# Altium PCB PCB_Tx.PcbDoc
Units mil, origin at the board's own origin, x right, y up, seen from the top; angles counter-clockwise.
Board outline 3010.03 x 2980.03 mil, 2 copper layers (Top Layer, Bottom Layer); 46 components, 39 nets, 191 pads, 38 vias.
Unrouted connection lines stored in the file: 3.
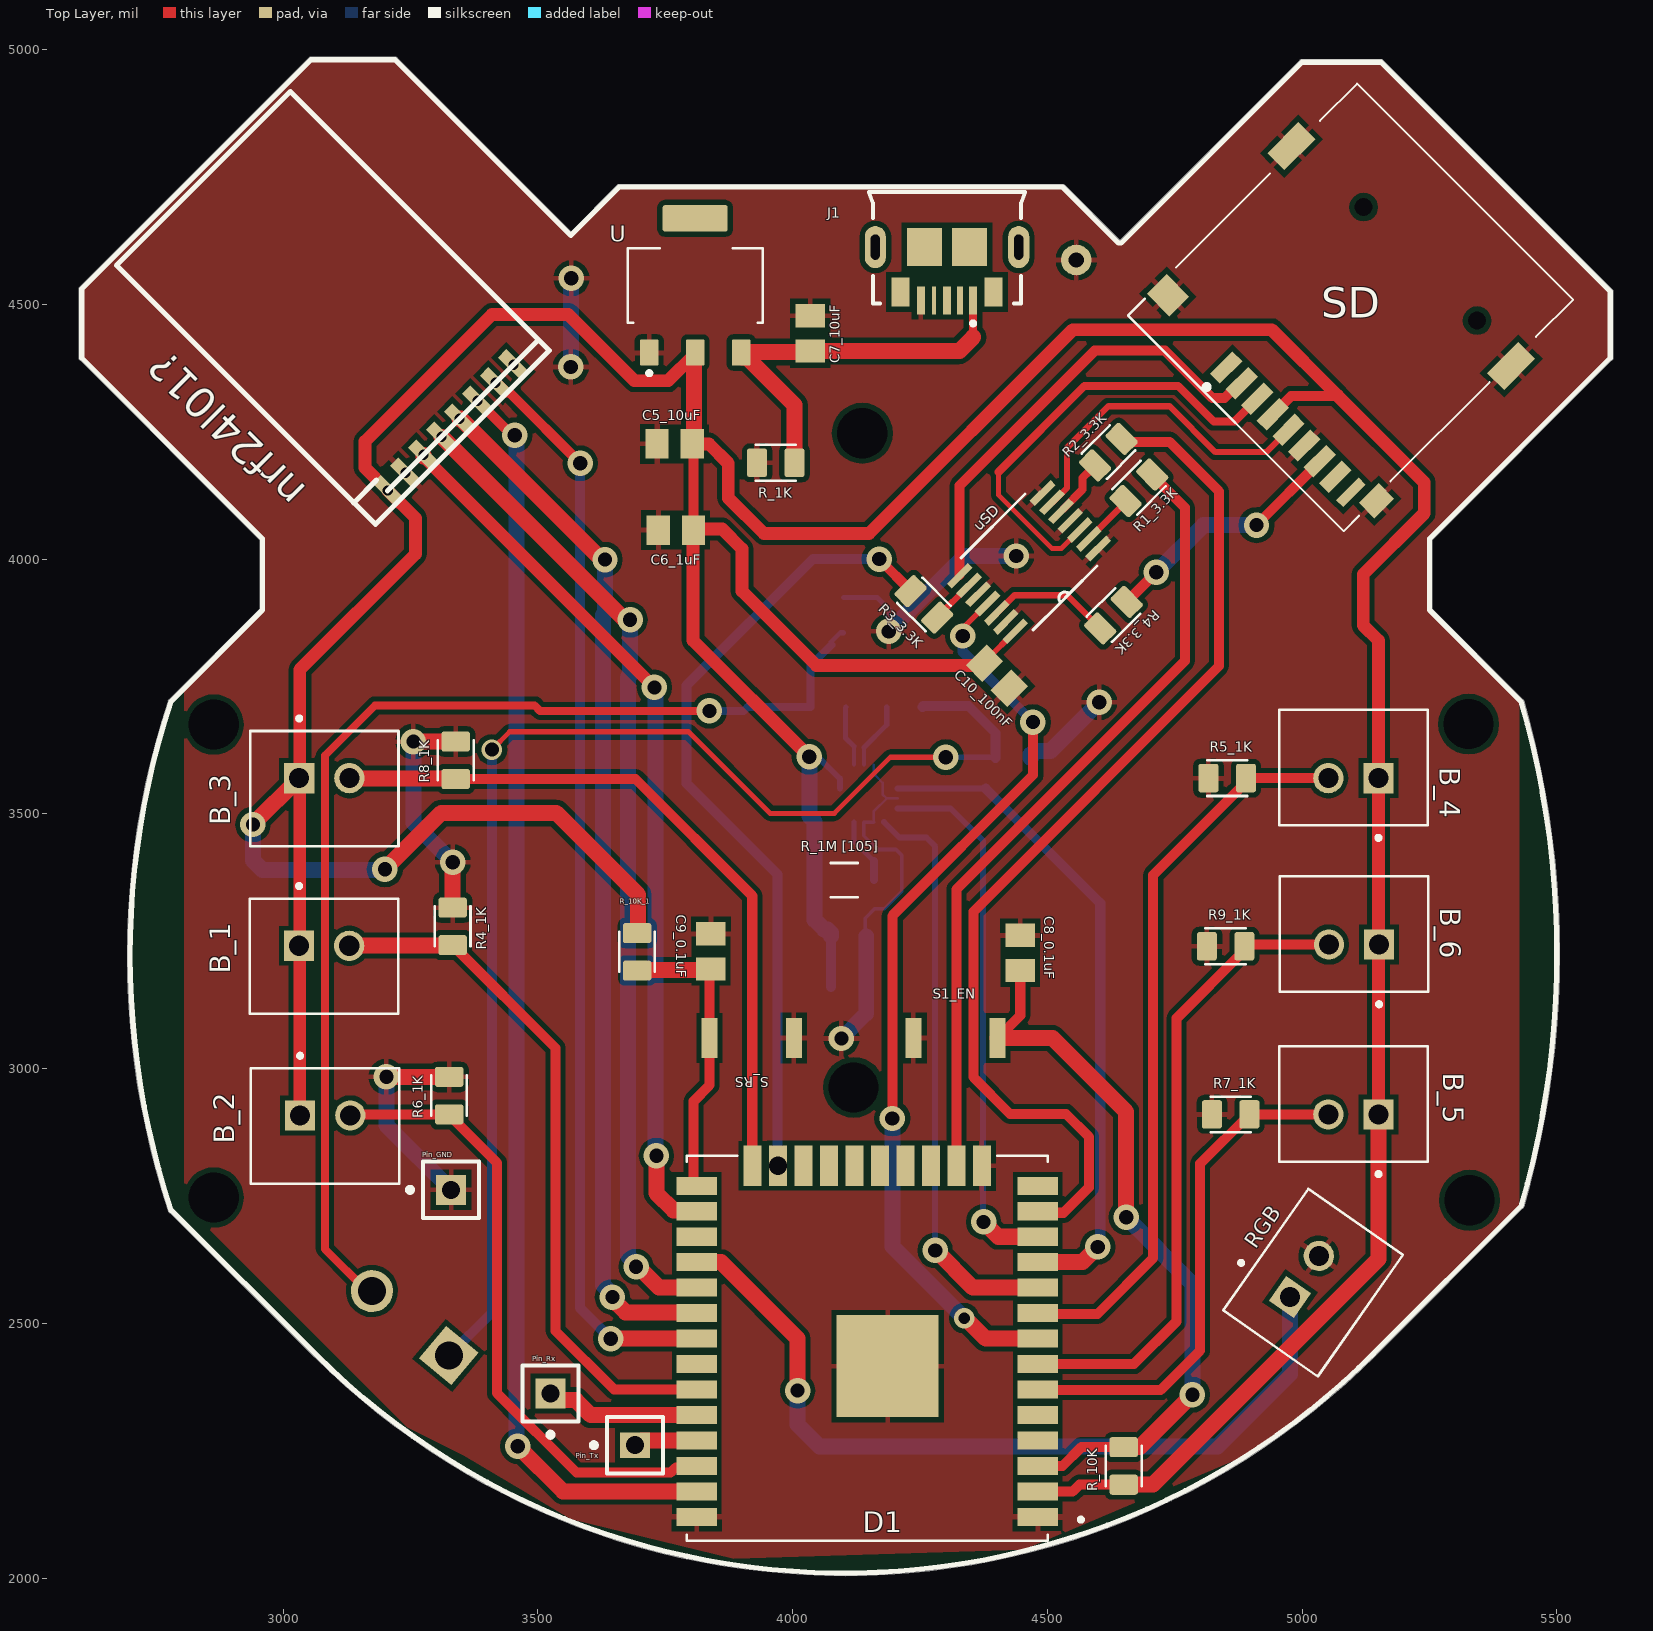
[diagram p0: Top Layer view]
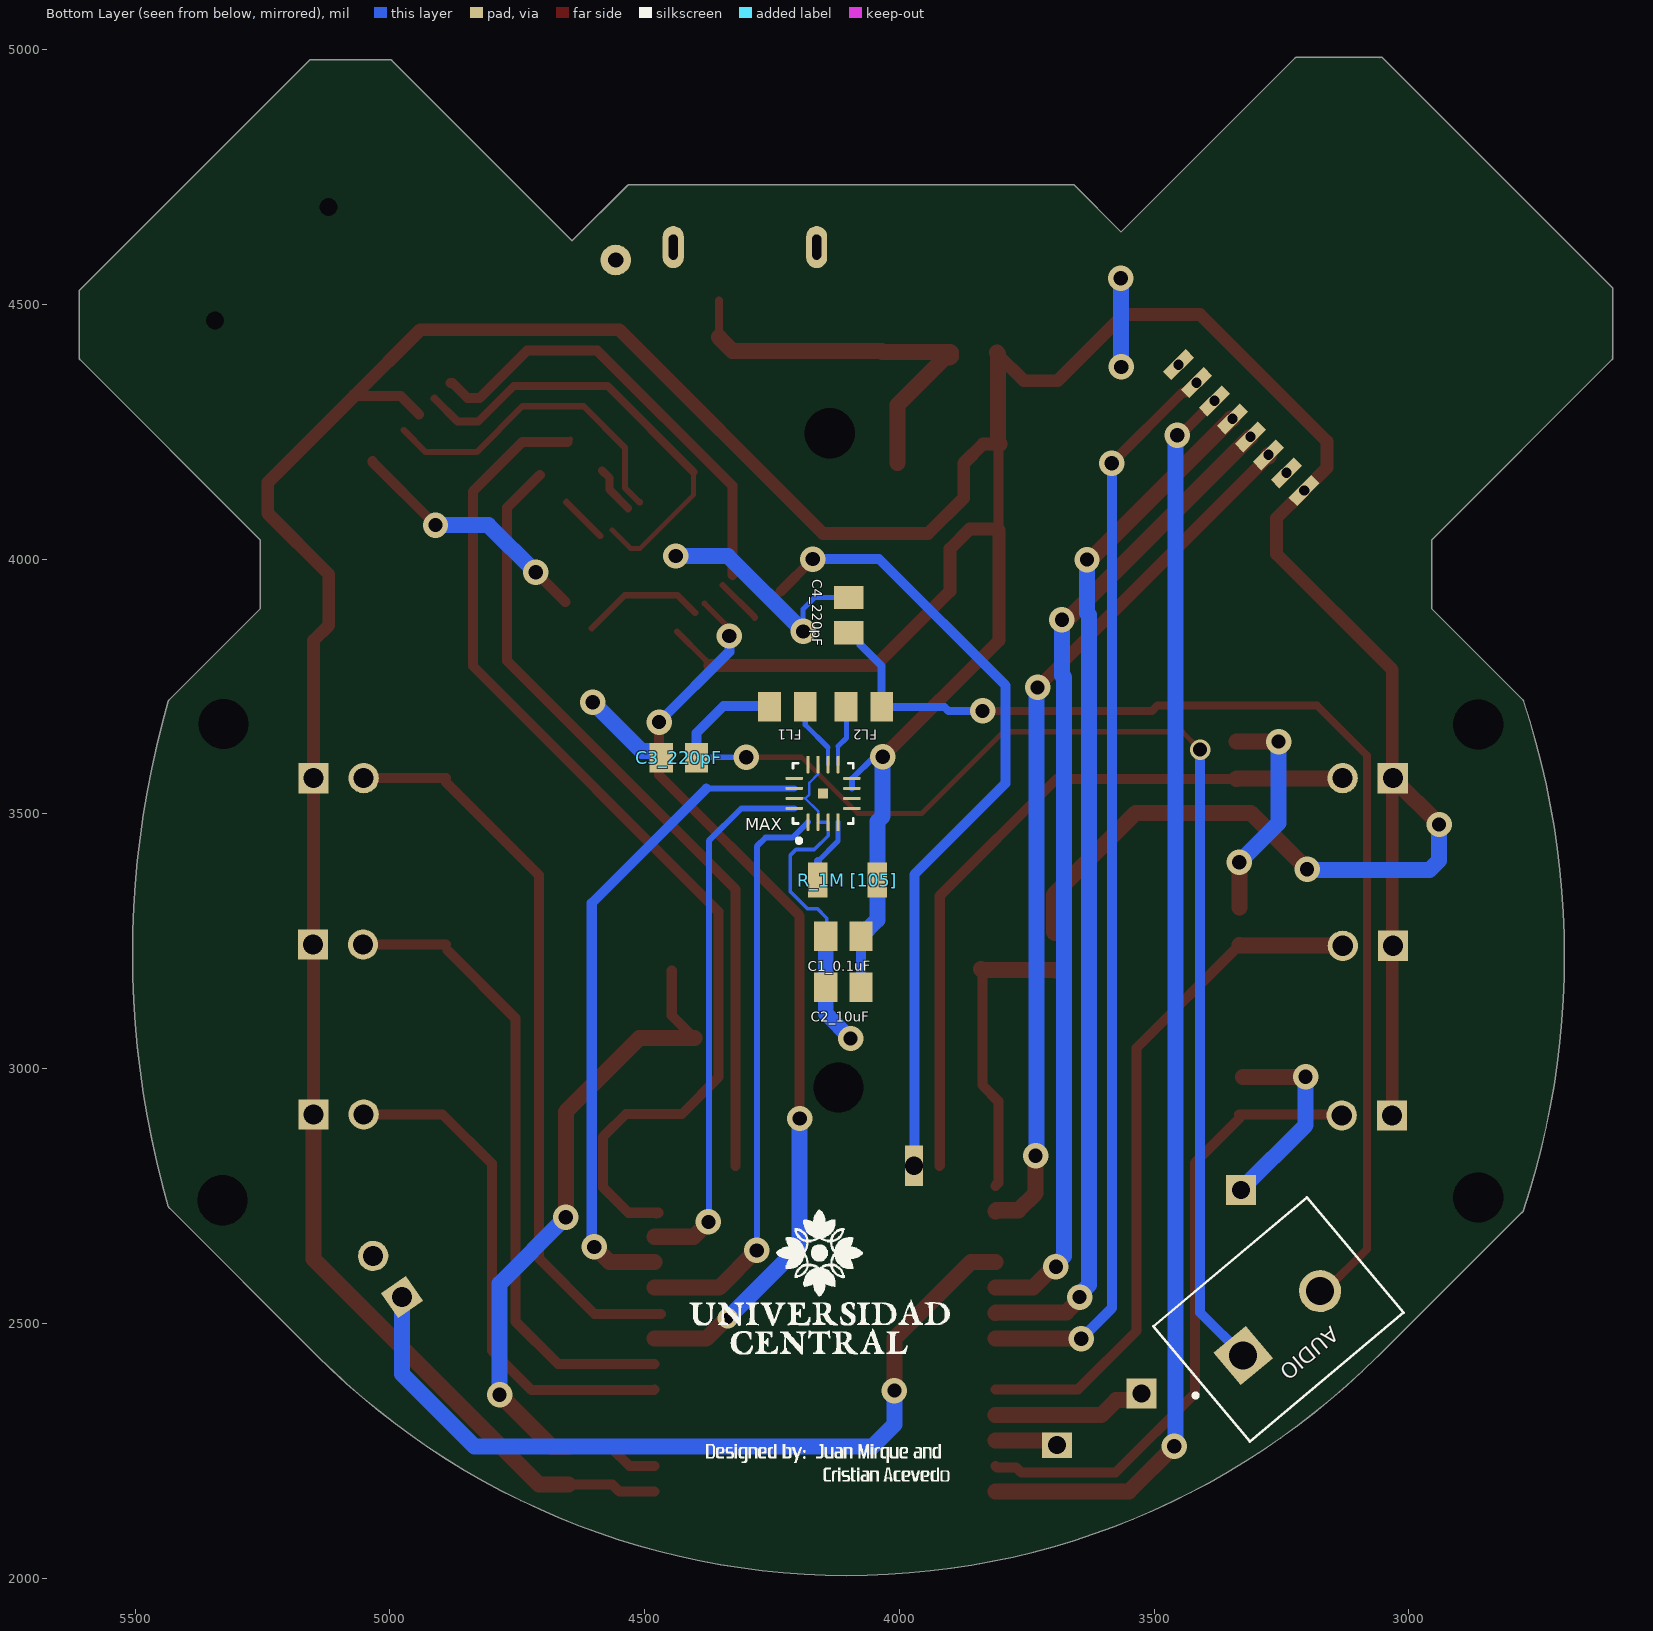
[diagram p1: Bottom Layer view, seen from below]

## Layer stack, top to bottom
Top Solder: solder mask 0.4, Solder Resist, Dk 3.5
Top Layer: signal copper 1.4
Dielectric 1: dielectric 12.6, FR-4, Dk 4.8
Bottom Layer: signal copper 1.4
Bottom Solder: solder mask 0.4, Solder Resist, Dk 3.5

## Board outline
2775.72,2720.29 cw(c4292.07,3221.67) 2775.24,3721.57 cw(c2780,3720) 2776.47,3723.56 2776.45,3723.55 2954.99,3902.08 2954.99,4037.92 2601.45,4391.45 cw(c2605,4395) 2600.65,4397.5 cw(c2605,4400) 2599.99,4400 2599.99,4530 cw(c2605,4530) 2601.47,4533.56 2601.45,4533.55 3051.44,4983.53 cw(c3054.99,4979.99) 3057.48,4984.34 cw(c3060,4980) 3060,4985.02 3220,4985.02 cw(c3220,4980) 3223.56,4983.53 3223.55,4983.55 3565,4642.09 3656.45,4733.55 3656.44,4733.53 cw(c3660,4730) 3660,4735.02 4530,4735.02 cw(c4530,4730) 4533.56,4733.53 4533.55,4733.55 4642.5,4624.59 4996.45,4978.55 4996.44,4978.53 cw(c5000,4975) 5000,4980.02 5155,4980.02 cw(c5155,4975) 5158.56,4978.53 5158.55,4978.55 5608.55,4528.55 5608.53,4528.56 cw(c5605,4525) 5610.02,4525 5610.02,4395 cw(c5605,4395) 5608.53,4391.44 5608.55,4391.45 5255.02,4037.92 5255.02,3902.08 5433.55,3723.54 5433.54,3723.56 cw(c5430.01,3719.99) 5434.82,3721.38 cw(c3714.85,3224.99) 5505.02,3224.99 cw(c3714.85,3224.99) 5434.82,2728.6 cw(c5430.01,2729.99) 5431.9,2725.35 5145.01,2438.46 5145.01,2438.47 ccw(c5141.46,2442) 5145.02,2438.47 5145.01,2438.47 cw(c4101.58,3477.54) 3062.51,2434.11 cw(c3066.05,2437.67) 3062.5,2434.12 2779,2717.08 cw(c2780.48,2721.87)

## Design rules (kind name [scope] priority, off if disabled: settings)
Clearance [All] p1: gap=10 ignorepadtopadclearanceinfootprint=FALSE except(0: Arc-Hole Track-Hole SMDPad-Hole THPad-Hole Via-Hole Fill-Hole Poly-Hole Region-Hole Text-Hole)
PolygonConnect [All] p1: connectstyle=Relief reliefconductorwidth=10 reliefentries=4 polygonreliefangle="90 Angle" airgapwidth=10
RoutingVias [All] p1: holewidth=28 width=50 viastyle="Through Hole" minholewidth=28 minwidth=50 maxholewidth=28 maxwidth=50
SolderMaskExpansion [All] p1: expansion=4 istentingtop=FALSE
Width [All] p1: maxlimit=31.5 minlimit=5 preferedwidth=31.5
30 further rules are at their usual default settings.

## Components (designator, comment, footprint, x,y, rotation, side; value= is the part's Value field where it differs from the comment)
AUDIO "KF301-2P" HANDSON_KF301-2P 3250,2500 r140 bottom
B_1 "" JST_B2B-XH-A(LF)(SN) 3080.79,3220.33 r180 top
B_2 "" JST_B2B-XH-A(LF)(SN) 3082.79,2887.33 r180 top
B_3 "" JST_B2B-XH-A(LF)(SN) 3081,3549.33 r180 top
B_4 "" JST_B2B-XH-A(LF)(SN) 5100.79,3590.67 r0 top
B_5 "" JST_B2B-XH-A(LF)(SN) 5100.79,2930.67 r0 top
B_6 "" JST_B2B-XH-A(LF)(SN) 5102,3264 r0 top
C1_0.1uF "0805" CAPC2012X94N 4110,3260 r0 bottom
C2_10uF "0805" CAPC2012X94N 4110,3160 r0 bottom
C3_220pF "0805" CAPC2012X94N 4433,3610 r0 bottom
C4_220pF "0805" CAPC2012X94N 4100,3890 r90 bottom
C5_10uF "0805" CAPC2012X94N 3768.65,4226 r0 top
C6_1uF "0805" CAPC2012X94N 3771,4057 r0 top
C7_10uF "0805" CAPC2012X94N 4035,4443 r270 top
C8_0.1uF "0805" CAPC2012X94N 4447,3227 r270 top
C9_0.1uF "0805" CAPC2012X94N 3840,3230 r270 top
C10_100nF "0805" CAPC2012X94N 4401,3771 r135 top
D1 "ESP32_MODULE_2" XCVR_ESP32-WROOM-32U 4146.62,2451 r180 top
FL1 "Ferrite Beads" BEADC2012X105N 4220,3710 r0 bottom
FL2 "Ferrite Beads" BEADC2012X105N 4070,3710 r180 bottom
J1 "USB3075-30-A" GCT_USB3075-30-A 4354.43,4507.87 r180 top
MAX "MAX98357AETE+" QFN50P300X300X80-17N 4150,3540 r90 bottom
nrf24l01? "SMD" NRF24L01 3226.15,4112.72 r135 top
Pin_GND "Socket" PIN1#1 3330,2762 r90 top
Pin_Rx "Socket" PIN1#1 3525,2362 r180 top
Pin_Tx "Socket" PIN1#2 3690.74,2260.74 r90 top
R1_3.3K "0805" RESC2012X65N 4680,4140 r45 top
R2_3.3K "0805" RESC2012X65N 4620,4210 r45 top
R3_3.3K "0805" RESC2012X65N 4258,3911 r135 top
R4_1K "0805" RESC2012X65N 3333,3279 r90 top
R4_3.3K "0805" RESC2012X65N 4630,3890 r45 top
R5_1K "0805" RESC2012X65N 4853.19,3570 r0 top
R6_1K "0805" RESC2012X65N 3326,2947 r90 top
R7_1K "0805" RESC2012X65N 4860,2910 r0 top
R8_1K "0805" RESC2012X65N 3339,3605 r90 top
R9_1K "0805" RESC2012X65N 4850,3240 r0 top
R_1K "0805" RESC2012X65N 3967.19,4189 r0 top
"R_1M [105]" "RC1206" RESC3116X65N 4101.73,3370 r180 top
R_10K "0805" RESC2012X65N 4650,2220 r90 top
R_10K_1 "0805" RESC2012X65N 3695,3229 r270 top
RGB "" JST_B2B-XH-A(LF)(SN) 5021.7,2580 r235 top
S1_EN "SW-PB" SKRK 4320,3060 r180 top
S_RS "SW-PB" SKRK 3920,3060 r0 top
SD "Micro SD Card Holder" "Micro SD Card Holder" 5122.7,4498.23 r135 top
U "AMS1117-3.3" SOT229P700X180-4N 3809,4537 r0 top
uSD "74LVC125APW,118" SOP65P640X110-14N 4464,3994 r225 top

## Footprints (in the part's own frame and the unit in brackets; to place one, negate y for a bottom-side part, rotate by r counter-clockwise, add the part's x,y. Pads: shape width x height; smd on the part's side, far side on the other; paste and mask are expansions set on the pad)
BEADC2012X105N [mm]
  rect 1.14x1.47 smd: 1(-0.89,0) 2(0.89,0)
CAPC2012X94N [mm]
  rect 1.16x1.47 smd: 1(-0.88,0) 2(0.88,0)
GCT_USB3075-30-A [mm]
  rect 0.4x1.4 smd: 1(0,0) 3(1.3,0) 5(2.6,0)
  rect 0.3x1.4 smd: 2(0.65,0)
  rect 0.2x1.4 smd: 4(1.95,0)
  rect 0.9x1.45 smd: S1(-1.02,-0.42) S2(3.62,-0.42)
  rect 1.75x1.9 smd: S3(0.175,-2.65) S4(2.425,-2.65)
  oval 1.05x2.1 hole 0.45 slot 1.25 at 90 deg: S5(-2.275,-2.65) S6(4.875,-2.65)
  silkscreen extent -2.6,-5.4 5.2,1.25, body extent -2.63,-5.31 5.17,0.24, height 2.7
HANDSON_KF301-2P [mm]
  rect 2.1x2.1 hole 1.4: 1(-2.5,0)
  round 2.1 hole 1.4: 2(2.5,0)
  silkscreen extent -5.7,-3.5 5,4
JST_B2B-XH-A(LF)(SN) [mm]
  rect 1.508x1.508 hole 1: 1(1.25,-0.525)
  round 1.508 hole 1: 2(-1.25,-0.525)
  silkscreen extent -3.7,-3.6 3.7,2.87, body extent -3.7,-2.96 3.7,2.79, height 7
"Micro SD Card Holder" [mm]
  rect 0.7x1.6 smd paste+0 mask+0: 1(2.684,7.075) 2(1.584,7.075) 3(0.484,7.075) 4(-0.616,7.075) 5(-1.716,7.075) 6(-2.816,7.075) 7(-3.916,7.075) 8(-5.016,7.075)
  rect 1.1x1.4 smd paste+0 mask+0: 10(-7.316,6.475)
  rect 1.6x1.4 smd paste+0 mask+0: 11(7.284,6.575)
  rect 1.2x2.2 smd paste+0 mask+0: 12(-7.316,-3.025) 13(8.184,-3.025)
  rect 0.5x1.6 smd paste+0 mask+0: Cd(-6.116,7.075)
  round 0 hole 0.9 unplated paste-1000 mask+0: ""(-4.516,-3.425) ""(3.484,-3.425)
  silkscreen extent -7.22,-7.55 8.08,8.7, body extent -7.57,-7.42 8.43,7.83, height 1.85
NRF24L01 [mil] "smd"
  rect 62.99x23.62 hole 20: 1(30,-1) 2(30,-49.99) 3(30,-100) 4(30,-150) 5(30,-200) 6(30,-250) 7(30,-300) 8(30,-350)
  silkscreen extent 0,-420 719,63, body extent -3,-412 706,60, height 32
PIN1#1 [mm] "Connector; Plug"
  rect 1.5x1.5 hole 0.9: 1(0,0)
  silkscreen extent -1.4,-1.4 1.4,2.17
PIN1#2 [mm] "Connector; Plug"
  rect 1.25x1.5 hole 0.9: 1(0,0)
  silkscreen extent -1.4,-1.4 1.4,2.17
QFN50P300X300X80-17N [mm]
  rrect50% 0.86x0.15 smd: 1(-1.435,0.75) 2(-1.435,0.25) 3(-1.435,-0.25) 9(1.435,-0.75) 10(1.435,-0.25) 11(1.435,0.25) 12(1.435,0.75)
  rect 0.86x0.15 smd: 4(-1.435,-0.75)
  rrect50% 0.15x0.86 smd: 5(-0.75,-1.435) 6(-0.25,-1.435) 7(0.25,-1.435) 8(0.75,-1.435) 13(0.75,1.435) 14(0.25,1.435) 15(-0.25,1.435) 16(-0.75,1.435)
  rect 0.508x0.508 smd paste-2: 17(0,0)
  silkscreen extent -2.46,-1.5 1.5,1.5, body extent -1.5,-1.5 1.5,1.5, height 0.75
RESC2012X65N [mm]
  rrect25% 1x1.42 smd: 1(-0.935,0) 2(0.935,0)
  silkscreen extent -1,-0.89 1,0.89
RESC3116X65N [mm]
  rect 0.97x1.73 smd far side: 1(-1.48,0) 2(1.48,0)
  silkscreen extent -0.67,-0.85 0.67,0.85
SKRK [mm]
  rect 0.8x2 smd: 1(-2.1,0) 2(2.1,0)
SOP65P640X110-14N [mil]
  rect 58x14 smd: 1(-115,77) 2(-115,51) 3(-115,26) 4(-115,0) 5(-115,-26) 6(-115,-51) 7(-115,-77) 8(115,-77) 9(115,-51) 10(115,-26) 11(115,0) 12(115,26) 13(115,51) 14(115,77)
  silkscreen extent -89,-100 89,100, body extent -131,-98 121,98, height 43
SOT229P700X180-4N [mm]
  rrect15% 0.93x1.31 smd: 1(-2.29,-3.345) 2(0,-3.345) 3(2.29,-3.345)
  rrect15% 3.24x1.31 smd: 4(0,3.345)
  silkscreen extent -3.36,-4.47 3.36,1.86, body extent -3.35,-3.52 3.35,3.78, height 1.91
XCVR_ESP32-WROOM-32U [mm]
  rect 2x0.9 smd: 1(-8.5,8.41) 2(-8.5,7.14) 3(-8.5,5.87) 4(-8.5,4.6) 5(-8.5,3.33) 6(-8.5,2.06) 7(-8.5,0.79) 8(-8.5,-0.48) 9(-8.5,-1.75) 10(-8.5,-3.02) 11(-8.5,-4.29) 12(-8.5,-5.56) 13(-8.5,-6.83) 14(-8.5,-8.1) 25(8.5,-8.1) 26(8.5,-6.83) 27(8.5,-5.56) 28(8.5,-4.29) 29(8.5,-3.02) 30(8.5,-1.75) 31(8.5,-0.48) 32(8.5,0.79) 33(8.5,2.06) 34(8.5,3.33) 35(8.5,4.6) 36(8.5,5.87) 37(8.5,7.14) 38(8.5,8.41)
  rect 0.9x2 smd: 15(-5.715,-9.1) 16(-4.445,-9.1) 17(-3.175,-9.1) 18(-1.905,-9.1) 19(-0.635,-9.1) 20(0.635,-9.1) 21(1.905,-9.1) 22(3.175,-9.1) 24(5.715,-9.1)
  rect 0.9x2 hole 0.9: 23(4.445,-9.1)
  rect 5.08x5.08 smd: 39(-1.016,0.889)
  silkscreen extent -10.75,-9.6 9,9.6, body extent -9.04,-9.65 9.04,9.59, height 3.4

## Part data
AUDIO: "2 Pin Terminal Block 5mm Pitch", Package=Package, Availability=Unavailable, MF="Handson Technology", MP=KF301-2P, Price=None, SnapEDA_Link=https://www.snapeda.com/parts/KF301-2P/Handson%20Technology/view-part/4276957/?ref=snap
B_1 B_2 B_3 B_4 B_5 B_6 RGB: library part B2B-XH-A(LF)(SN), "Connector Header Through Hole 2 position 0.098 (2.50mm)", Package=None, Availability="In Stock", Check_prices=https://www.snapeda.com/parts/B2B-XH-A(LF)(SN)/JST%20Sales%20America%20Inc./view-part/492310/?ref=eda, MF="JST Sales", MP=B2B-XH-A(LF)(SN), Price=None, Purchase-URL=https://pricing.snapeda.com/search/part/B2B-XH-A(LF)(SN)/?ref=eda, SnapEDA_Link=https://www.snapeda.com/parts/B2B-XH-A(LF)(SN)/JST%20Sales%20America%20Inc./view-part/492310/?ref=snap
C1_0.1uF C2_10uF C3_220pF C4_220pF C5_10uF C6_1uF C7_10uF C8_0.1uF C9_0.1uF C10_100nF: library part 0805YC103J4T2A, "10000pF Â±5% 16V Ceramic Capacitor X7R 0805 _2012 Metric_", Package="2012 AVX", Availability=Unavailable, MF=AVX, MP=0805YC103J4T2A, Price=None, SnapEDA_Link=https://www.snapeda.com/parts/0805YC103J4T2A/AVX/view-part/606803/?ref=snap
FL1 FL2: library part BLM21PG221BH1D, Package=None, Availability=Unavailable, MP=BLM21PG221BH1D, Price=None
J1: "USB - micro B USB 2.0 Receptacle Connector 5 Position Surface Mount, Right Angle; Through Hole", Package=None, Digi-Key_Part_Number=2073-USB3075-30-ACT-ND, Digi-Key_Purchase_URL=https://www.digikey.com/product-detail/en/gct/USB3075-30-A/2073-USB3075-30-ACT-ND/9859705?utm_source=snapeda&utm_medium=aggregator&utm_campaign=symbol, MF="Global Connector Technology", MP=USB3075-30-A, SnapEDA_Link=https://www.snapeda.com/parts/USB3075-30-A/Global%20Connector%20Technology/view-part/229370/?ref=snap
MAX: "Amplifier IC 1-Channel _Mono_ Class D 16-TQFN _3x3_", Package="TQFN-16 Maxim", Availability=Unavailable, MF="Maxim Integrated", MP=MAX98357AETE+, Price=None, SnapEDA_Link=https://www.snapeda.com/parts/MAX98357AETE%2B/Maxim%20Integrated/view-part/229145/?ref=snap
nrf24l01?: library part nrf24l01_smd
R1_3.3K R2_3.3K R3_3.3K R4_1K R4_3.3K R5_1K R6_1K R7_1K R8_1K R9_1K R_1K R_10K R_10K_1: library part 2-2176053-0, "RES 0.33 OHM 1% 1/4W 0805", Power_Rating=".25 W", Resistance=.33, Tolerance=1%, Availability=Unavailable, EU_RoHS_Compliance="Compliant with Exemptions", MF="TE Connectivity", MP=2-2176053-0, Package=0805, Price=None, SnapEDA_Link=https://www.snapeda.com/parts/2-2176053-0/TE%20Connectivity/view-part/2214508/?ref=snap
"R_1M [105]": library part RC1206JR-0713RL, "13 Ohms Â±5% 0.25W, 1/4W Chip Resistor 1206 _3216 Metric_ Moisture Resistant Thick Film", Package="3116 Yageo", Availability=Unavailable, MF=Yageo, MP=RC1206JR-0713RL, Price=None, SnapEDA_Link=https://www.snapeda.com/parts/RC1206JR-0713RL/Yageo/view-part/105893/?ref=snap
S1_EN S_RS: "Switch", LatestRevisionDate=17-Jul-2002, LatestRevisionNote="Re-released for DXP Platform.", PackageDescription="Switch; 2 Leads", PackageReference=SPST-2, Published=24-Mar-1999, Publisher="Altium Limited"
U: "Sot223/Pkg 1-Amp 3.3-Volt Low Drop Out Voltage Regulatator", Package=None, Availability=Unavailable, MF="Advanced Monolithic Systems", MP=AMS1117-3.3, Price=None, SnapEDA_Link=https://www.snapeda.com/parts/AMS1117-3.3/Advanced%20Monolithic%20Systems/view-part/53450/?ref=snap
uSD: "IC BUF NON-INVERT 3.6V 14TSSOP", Package=None, Availability=Good, Check_prices=https://www.snapeda.com/parts/74LVC125APW,118/Nexperia/view-part/5160321/?ref=eda, MF="Nexperia USA Inc.", MP=74LVC125APW,118, Price=None, Purchase-URL=https://pricing.snapeda.com/search/part/74LVC125APW,118/?ref=eda, SnapEDA_Link=https://www.snapeda.com/parts/74LVC125APW,118/Nexperia/view-part/5160321/?ref=snap
Pin_GND Pin_Rx Pin_Tx: LatestRevisionDate=17-Jul-2002, LatestRevisionNote="Re-released for DXP Platform.", Publisher="Altium Limited"

## Free pads (board coordinates)
  round 0 hole 98.42 unplated paste-39370.1 mask+0: 13(2864,2746.91) 13(2864,3675) 13(4120,2963) 13(4137,4247) 13(5327,3676) 13(5329,2741) 13(5329,2742)
  round 60 hole 30: 16(4557,4587)

## Via types
v1: diameter 50, hole 28, Top Layer to Bottom Layer, 36 vias
v2: diameter 40, hole 28, Top Layer to Bottom Layer, 1 vias
v3: diameter 40, hole 22, Top Layer to Bottom Layer, 1 vias

## Nets (pads, with @x,y where several pads share a name; then routed paths per layer and width w, separated by ;. In a path a pad name is that pad's centre, name@x,y a point inside that pad or via, vN(x,y) a via of type N, cw(c..) or ccw(c..) an arc to the next point about the centre after c; other vN are vias at no path point)
3v3: "R_1M [105].2" B_1.1 B_2.1 B_3.1 B_4.1 B_5.1 B_6.1 C1_0.1uF.1 C2_10uF.1 C5_10uF.2 C6_1uF.2 C10_100nF.2 D1.2 MAX.7 MAX.8 nrf24l01?.1 R_10K.1 R_10K_1.1 SD.4 U.2 uSD.14 | length 10134.4
  Top Layer w10: C6_1uF.2 C6_1uF.2@3807.65,4059 ; C10_100nF.2@4372.19,3791.18 C10_100nF.2 ; 5069.45,4321.26 5069.45,4320 5070.08,4320
  Top Layer w11.81: C10_100nF.2@4380.69,3801.79 uSD.14
  Top Layer w19.68: 3180,4160.28 nrf24l01?.1 ; C5_10uF.2 3805.65,4226 C6_1uF.2 ; D1.2 4549.9,2169.9 4563.19,2183.19 R_10K.1 ; SD.4 4978.77,4320 5069.45,4320
  Top Layer w25: B_2.1 3033,2908 3033,3783 3260,4010 3260,4080.28 nrf24l01?.1 ; 3180,4160.28 3161,4179.28 3161,4231 3410,4480 3560,4480 3690,4350 3755.69,4350 U.2@3806.44,4400.75 ; C6_1uF.2 3804.65,4057 3804.65,3840.35 v1(4033,3612) ; C5_10uF.2@3805.65,4226 3836,4226 3874,4188 3874,4120 3944,4050 4150,4050 4550,4450 4940.71,4450 5069.45,4321.26 ; C6_1uF.2@3807.65,4059 3862,4059 3901,4020 3901,3937 4046.82,3791.18 C10_100nF.2@4372.19,3791.18 ; 5070.08,4320 5240,4150.08 5240,4090 5120,3970 5120,3870 5150,3840 B_4.1 B_5.1
  Top Layer w31.5: v1(2941,3479) 2941,3479.21 B_3.1 ; v1(3200,3391) 3311,3502 3536,3502 3697,3341 3697,3267.81 R_10K_1.1 ; C5_10uF.2 3806.44,4229.15 3806.44,4400.75 3806.44,4402.75 U.2 ; R_10K.1 4707.19,2183.19 5150,2626 B_5.1
  Bottom Layer w11.81: v1(4033,3612) 4049.85,3612 4092.32,3569.53 MAX.8 MAX.7
  Bottom Layer w19.68: C2_10uF.1 C1_0.1uF.1
  Bottom Layer w31.5: v1(2941,3479) 2941,3408.45 2959.45,3390 3199,3390 v1(3200,3391) ; v1(4033,3612) 4033,3495.21 4043.46,3484.75 4043.46,3370 4043.46,3291.89 4062.17,3273.19 4068.27,3273.19 4075.35,3266.1 C1_0.1uF.1
GND: C1_0.1uF.2 C2_10uF.2 C3_220pF.2 C4_220pF.2 C5_10uF.1 C6_1uF.1 C7_10uF.1 C8_0.1uF.1 C9_0.1uF.1 C10_100nF.1 D1.1 D1.15 D1.38 D1.39 J1.5 MAX.2 MAX.3 MAX.11 MAX.15 nrf24l01?.2 pad.16 Pin_GND.1 R4_1K.2 R5_1K.1 R6_1K.2 R7_1K.1 R8_1K.2 R9_1K.1 R_1K.1 RGB.2 S1_EN.2 S_RS.2 SD.6 SD.10 SD.11 SD.12 SD.13 U.1 uSD.1 uSD.4 uSD.7 uSD.10 uSD.13 | length 2377.7
  Top Layer w31.5: v1(3203,2983.81) R6_1K.2 ; v1(3256,3641.81) R8_1K.2 ; R4_1K.2 v1(3333,3405) ; v1@3563,4368 3563,4375 v1(3565,4377) ; v1@4596.99,3719 v1(4602,3719)
  Bottom Layer w5: MAX.2 4159.84,3505.26 4184.95,3530.37 ; MAX.11 4159.84,3578.16 4177,3561 4177,3538.32 4184.95,3530.37 ; MAX.15 4206.29,3530.37 4184.95,3530.37
  Bottom Layer w7: C1_0.1uF.2 4142.66,3261.98 4142.66,3295.34 4161.33,3314 4181,3314 4214,3347 4214,3419 4203,3430 4167,3430 4140.16,3456.84 MAX.3 MAX.2
  Bottom Layer w10: C4_220pF.2 4166.35,3924.65 4189,3902 v1(4189,3858)
  Bottom Layer w30: v1(4096,3059) 4144.65,3107.65 C2_10uF.2 C1_0.1uF.2
  Bottom Layer w31.5: v1(3203,2983.81) 3203,2889 Pin_GND.1 ; v1(3256,3641.81) 3256,3482 v1(3333,3405) ; v1(3565,4377) 3565.5,4377.5 3565.5,4550.5 v1(3566,4551) ; v1(4189,3858) 4337,4006 v1(4439,4006) ; C3_220pF.2 4467.65,3616.1 4474.73,3623.19 4506.19,3623.19 v1(4602,3719)
NetAUDIO_1: AUDIO.1 C3_220pF.1 FL1.2 | length 2553.8
  Top Layer w10: v2(3410,3626) 3445,3661 3796,3661 3956,3501 4082,3501 4192,3611 v1(4301,3611)
  Bottom Layer w10: v1(4301,3611) 4397.35,3611 C3_220pF.1
  Bottom Layer w19.68: AUDIO.1 3410,2521.34 v2(3410,3626) ; FL1.2 4256.46,3711.42 4345.58,3711.42 4398.35,3658.65 C3_220pF.1
NetAUDIO_2: AUDIO.2 C4_220pF.1 FL2.2 | length 2272.6
  Top Layer w10: AUDIO.2@3164.73,2563.27 AUDIO.2
  Top Layer w15.75: AUDIO.2@3164.73,2563.27 3082,2646 3082,3614 3181,3713 3493.59,3713 3504.59,3702 v1(3837,3702)
  Bottom Layer w10: 4076.06,3831.42 4076.06,3837.52 4093.9,3855.35 C4_220pF.1
  Bottom Layer w15.75: v1(3837,3702) 3904,3702 3912,3710 FL2.2 4034.96,3790.32 4076.06,3831.42
NetB_1_2: B_1.2 D1.33 R4_1K.1 | length 1369
  Top Layer w19.68: R4_1K.1 3535,3040.19 3535,2485 3650.1,2369.9 D1.33
  Top Layer w31.5: B_1.2 3130.59,3241.59 3332.41,3241.59 R4_1K.1
NetB_2_2: B_2.2 D1.36 R6_1K.1 | length 1248.1
  Top Layer w10: R6_1K.1@3333.19,2901.73 R6_1K.1@3333.19,2910
  Top Layer w19.68: B_2.2 3132,2910 3326,2910 R6_1K.1@3333.19,2910 ; R6_1K.1@3333.19,2901.73 3420,2814.92 3420,2362.9 3575.9,2207 3761,2207 3771,2217 3809.07,2217 D1.36
NetB_3_2: B_3.2 D1.24 R8_1K.1 | length 1416.5
  Top Layer w19.68: R8_1K.1 3691.81,3568.19 3921,3339 3921,2809.88 D1.24
  Top Layer w31.5: B_3.2 3131.12,3569.09 3338.09,3569.09 R8_1K.1
NetB_4_2: B_4.2 D1.9 R5_1K.2 | length 1463.8
  Top Layer w10: R5_1K.2@4890,3561.73 R5_1K.2
  Top Layer w19.68: D1.9@4468.52,2518.48 4481.26,2518.48 4598.48,2518.48 4708,2628 4708,3379.73 R5_1K.2@4890,3561.73 ; R5_1K.2 B_4.2
NetB_5_2: B_5.2 D1.6 R7_1K.2 | length 1009.7
  Top Layer w19.68: D1.6 4482.16,2369 4722.67,2369 4800,2446.33 4800,2813.19 R7_1K.2 B_5.2
NetB_6_2: B_6.2 D1.7 R9_1K.2 | length 1265.9
  Top Layer w10: R9_1K.2@4886.81,3231.73 R9_1K.2 R9_1K.2@4890.14,3243.33
  Top Layer w19.68: D1.7 4669.9,2419.9 4754,2504 4754,3098.92 R9_1K.2@4886.81,3231.73 ; R9_1K.2@4890.14,3243.33 B_6.2
NetC7_10uF_2: C7_10uF.2 J1.1 R_1K.2 U.3 | length 805.4
  Top Layer w15.75: 4354.43,4435.43 J1.1
  Top Layer w31.5: R_1K.2 4004,4302.34 3911.07,4395.27 3901.72,4395.27 3899.16,4397.83 U.3 3900.68,4406.83 4033.48,4406.83 C7_10uF.2 4327.35,4408.35 4354.43,4435.43
NetC8_0.1uF_2: C8_0.1uF.2 D1.3 R_10K.2 S1_EN.1 | length 1433.7
  Top Layer w19.68: S1_EN.1 4447,3104.32 C8_0.1uF.2 ; D1.3 4529.9,2219.9 4566.81,2256.81 R_10K.2
  Top Layer w31.5: S1_EN.1 4510,3060 4655,2915 v1(4655,2708) ; R_10K.2 4681.81,2256.81 v1(4785,2360)
  Bottom Layer w31.5: v1(4655,2708) 4785,2578 v1(4785,2360)
NetC9_0.1uF_2: C9_0.1uF.2 D1.25 R_10K_1.2 S_RS.1 | length 585.6
  Top Layer w19.68: D1.25 3806,2775.87 3806,2936 3837.32,2967.32 S_RS.1 C9_0.1uF.2@3837.32,3193.77
  Top Layer w31.5: R_10K_1.2 3696.58,3193.77 3837.32,3193.77 3838.42,3193.77 C9_0.1uF.2
NetD1_8: D1.8 uSD.11 | length 1791.1
  Top Layer w11: v1@4339.43,3869.43 uSD.11
  Top Layer w19.7: v1@4195.83,2902.17 4195.83,3299.83 4472,3576 v1(4472,3680)
  Top Layer w31.5: v1@4195.83,2902.17 v1(4196,2902) ; v3(4337,2510) 4339.3,2510 4379.4,2469.9 D1.8
  Bottom Layer w19.7: v1(4334,3849) 4334,3818 v1(4472,3680)
  Bottom Layer w31.5: v1(4196,2902) 4196,2651 v3(4337,2510)
NetD1_10: D1.10 MAX.1 | length 1144.7
  Top Layer w31.5: v1(4280,2643) 4281,2643 4354.1,2569.9 D1.10
  Bottom Layer w11.81: MAX.1 4209.59,3453.45 4262.55,3453.45 4280,3436 v1(4280,2643)
NetD1_11: D1.11 MAX.14 | length 1300.8
  Top Layer w31.5: D1.11 4568.89,2619.9 v1(4598.99,2650)
  Bottom Layer w11.81: MAX.14 4379.16,3549.84 ; v1(4598.99,2650) v1@4604,2650
  Bottom Layer w19: 4379.16,3549.84 4604,3325
  Bottom Layer w20: v1@4604,2650 4604,3325
NetD1_12: D1.12 MAX.16 | length 1060.5
  Top Layer w31.5: v1@4374,2704 4375,2703 v1(4375,2699) 4404.1,2669.9 D1.12
  Bottom Layer w11.81: MAX.16 4310.53,3510.47 4374,3447 v1@4374,2704
NetD1_13: D1.13 R2_3.3K.2 | length 2091.3
  Top Layer w10: R2_3.3K.2 R2_3.3K.2@4651.88,4230.18
  Top Layer w19.68: D1.13@4476.95,2715.86 4473.13,2717 4532,2717 4582,2767 4582,2866 4537,2911 4427,2911 4355,2983 4355,3308 4837,3790 4837,4133 4739.82,4230.18 R2_3.3K.2@4651.88,4230.18
NetD1_16: D1.16 R1_3.3K.2 | length 1569
  Top Layer w10: R1_3.3K.2@4706.03,4165 R1_3.3K.2 ; 4770,4100 4770,4101.03
  Top Layer w19.68: D1.16 4321.62,3351.62 4770,3800 4770,4100 ; R1_3.3K.2@4706.03,4165 4770,4101.03
NetD1_23: D1.23 R3_3.3K.2 | length 1590.4
  Top Layer w19.68: v1(4170,4000) 4233.97,3936.03 R3_3.3K.2
  Bottom Layer w19.68: D1.23 3971,2809.88 3971,3381 3792.16,3559.84 3792.16,3752.16 4040,4000 v1(4170,4000)
NetD1_26: D1.26 nrf24l01?.3 | length 1732.4
  Top Layer w23.6: nrf24l01?.3@3275.64,4201.36 v1(3729,3748)
  Top Layer w31.5: nrf24l01?.3@3275.64,4201.36 nrf24l01?.3 ; v1(3733,2829) 3733,2755.37 3766.5,2721.87 3810,2721.87 D1.26
  Bottom Layer w31.5: v1(3729,3748) 3731,3746 3731,2831 v1(3733,2829)
NetD1_28: D1.28 RGB.1 | length 1623.5
  Top Layer w31.5: D1.28 3860,2619.9 4010,2469.9 v1(4010,2368)
  Bottom Layer w31.5: v1(4010,2368) 4010,2301 4053,2258 4834,2258 4976.55,2400.55 RGB.1
NetD1_29: D1.29 nrf24l01?.4 | length 1932.9
  Top Layer w31.5: nrf24l01?.4 3311.53,4240 3667.02,3884.51 3677.57,3884.51 v1(3681.11,3880.97) ; v1(3693,2611) 3697,2611 3738.1,2569.9 D1.29
  Bottom Layer w31.5: v1(3681.11,3880.97) 3681.11,3771.88 3677.25,3768.02 3677.25,2631.76 3693,2616.01 v1(3693,2611)
NetD1_30: D1.30 nrf24l01?.5 | length 2025.3
  Top Layer w31.5: nrf24l01?.5 3349,4275.36 v1@3621.36,4003 ; v1(3646.55,2551.5) 3646.55,2547.51 3672.63,2521.43 3810.44,2521.43 D1.30
  Bottom Layer w31.5: v1(3632,3999) 3632,3893.77 3628.25,3890.02 3628.25,2574.8 3646.55,2556.51 v1(3646.55,2551.5)
NetD1_31: D1.31 nrf24l01?.7 | length 2143.5
  Top Layer w19.68: nrf24l01?.7 3419.85,4346.07 3439.17,4326.74 3444.67,4326.74 v1(3583.22,4188.2)
  Top Layer w31.5: v1(3643.1,2469.9) D1.31
  Bottom Layer w19.68: v1(3583.22,4188.2) 3583.22,2529.78 v1(3643.1,2469.9)
NetD1_34: D1.34 Pin_Rx.1 | length 304.4
  Top Layer w31.5: Pin_Rx.1 3537.94,2349.06 3574.94,2349.06 3604.1,2319.9 D1.34
NetD1_35: D1.35 Pin_Tx.1 | length 125
  Top Layer w31.5: Pin_Tx.1 3695.66,2260.74 3704.82,2269.9 D1.35
NetD1_37: D1.37 nrf24l01?.6 | length 2476
  Top Layer w19.68: nrf24l01?.6 3449.42,4243 v1(3455,4243)
  Top Layer w31.5: v1(3460.76,2258.72) 3549.59,2169.9 D1.37
  Bottom Layer w31.5: v1(3455,4243) 3457.88,4240.12 3457.88,2261.6 v1(3460.76,2258.72)
NetFL1_1: FL1.1 MAX.10 | length 132.1
  Bottom Layer w7.87: MAX.10 4140.16,3629.84 4140.47,3630.16
  Bottom Layer w10: 4140.47,3630.16 4184.96,3674.65 FL1.1
NetFL2_1: FL2.1 MAX.9 | length 120.8
  Bottom Layer w7.87: MAX.9 4120.47,3632.53
  Bottom Layer w10: FL2.1 4104,3708.96 4104,3649 4120.47,3632.53
NetMAX_4: "R_1M [105].1" MAX.4 | length 129.9
  Bottom Layer w10: MAX.4 4120.47,3446.53 4160,3407
  Bottom Layer w15.75: 4160,3370 4160,3407
NetR1_3.3K_1: R1_3.3K.1 uSD.2 | length 96.3
  Top Layer w10: R1_3.3K.1@4653.97,4111.85 R1_3.3K.1
  Top Layer w12.6: uSD.2@4587.38,4045.25 R1_3.3K.1@4653.97,4111.85
NetR2_3.3K_1: R2_3.3K.1 uSD.5 | length 95.4
  Top Layer w10: R2_3.3K.1@4583.59,4173.59 R2_3.3K.1@4583.97,4173.97
  Top Layer w15.75: uSD.5@4532.93,4099.7 4569.44,4136.21 4569.44,4159.44 R2_3.3K.1@4583.59,4173.59
NetR3_3.3K_1: R3_3.3K.1 uSD.9 | length 89.7
  Top Layer w12.6: R3_3.3K.1 4284.03,3886.15 uSD.9
NetR4_3.3K_1: R4_3.3K.1 uSD.12 | length 244.2
  Top Layer w12.6: uSD.12 4435.77,3929 4538.94,3929 R4_3.3K.1
NetR4_3.3K_2: R4_3.3K.2 SD.7 | length 494
  Top Layer w19.68: R4_3.3K.2 v1(4714,3974) ; v1(4910.7,4066.71) 5034.75,4190.76 SD.7
  Bottom Layer w31.5: v1(4714,3974) 4806.71,4066.71 v1(4910.7,4066.71)
NetSD_2: SD.2 uSD.8 | length 889.5
  Top Layer w19.68: uSD.8@4328,3968.57 4328,4144 4593,4409 4731,4409 4824,4316 4847.94,4316 4877.3,4345.36 SD.2
NetSD_3: SD.3 uSD.3 | length 888.9
  Top Layer w10: 4404,4171 4404,4126 4509,4021 4527.77,4021 uSD.3
  Top Layer w15.75: 4404,4171 4573,4340 4756.85,4340 4826.85,4270 4867.53,4270 SD.3
NetSD_5: SD.5 uSD.6 | length 644
  Top Layer w12.2: uSD.6 4510.38,4111.38 4539,4140 4539,4219 4620,4300 4740,4300 4830,4210 4930.02,4210 SD.5
pads on no net: D1.4 D1.5 D1.14 D1.17 D1.18 D1.19 D1.20 D1.21 D1.22 D1.27 D1.32 J1.2 J1.3 J1.4 J1.S1 J1.S2 J1.S3 J1.S4 J1.S5 J1.S6 MAX.5 MAX.6 MAX.12 MAX.13 MAX.17 nrf24l01?.8 SD. SD.1 SD.8 SD.Cd U.4

## Polygon pours and split planes (outlines as drawn)
GND on Top Layer "GND_L01_P005" (solid, pour order 5): 3054,4979 3218,4979 3219,4980 3564,4635 3567,4635 3661,4729 4532,4729 4640,4621 4712,4693 4712,4694 4713,4694 4998,4979 5156,4979 5156,4972 5605,4523 5605,4394 5603,4394 5249,4040 5249,3900 5428,3721 5426,3719 5426,2728 5087.05,2389.05 4918.91,2252.64 4453.21,2055.88 3885.07,2038.1 3566,2115 3356,2240 3244,2296 2806,2734 2806,3745 2960,3899 2960,4041 2606,4395 2606,4531

## Silkscreen, mask and mechanical layers (free items; w line width, h text height)
Top Overlay:
  lines w10: 2780.48,2721.87 cw(c4292.07,3221.67) 2780,3720 2960,3900 2960,4040 2879.99,4120.01 2605,4395 2605,4400 2605,4530 3054.99,4979.99 3060,4980 3220,4980 3565,4635 3660,4730 4530,4730 4640,4620 4645,4620 5000,4975 5155,4975 5605,4525 5605,4395 5250,4040 5250,3900 5430.01,3719.99 cw(c3714.85,3224.99) 5430.01,2729.99 ; 2781.58,2721.58 3066.05,2437.67 ccw(c4101.58,3477.54) 5141.46,2442 5429.45,2729.99 5430,2729.99 ; 5430,2729.99 5430.01,2729.99
Bottom Overlay:
  drawing of 64 lines, arcs and shapes, not listed

## Text inside footprints (layer, text, board x,y; h text height)
J1: Mechanical 13 "PCB EDGE" at 4129.41,4667.52 h16.06 r180